# Altium PCB BalanceCar_pcb.PcbDoc (part 2 of 2)
Units mil, origin at the board's own origin, x right, y up, seen from the top; angles counter-clockwise.
Board outline 4685.52 x 2519.84 mil, 2 copper layers (Top Layer, Bottom Layer); 150 components, 131 nets, 624 pads, 420 vias.
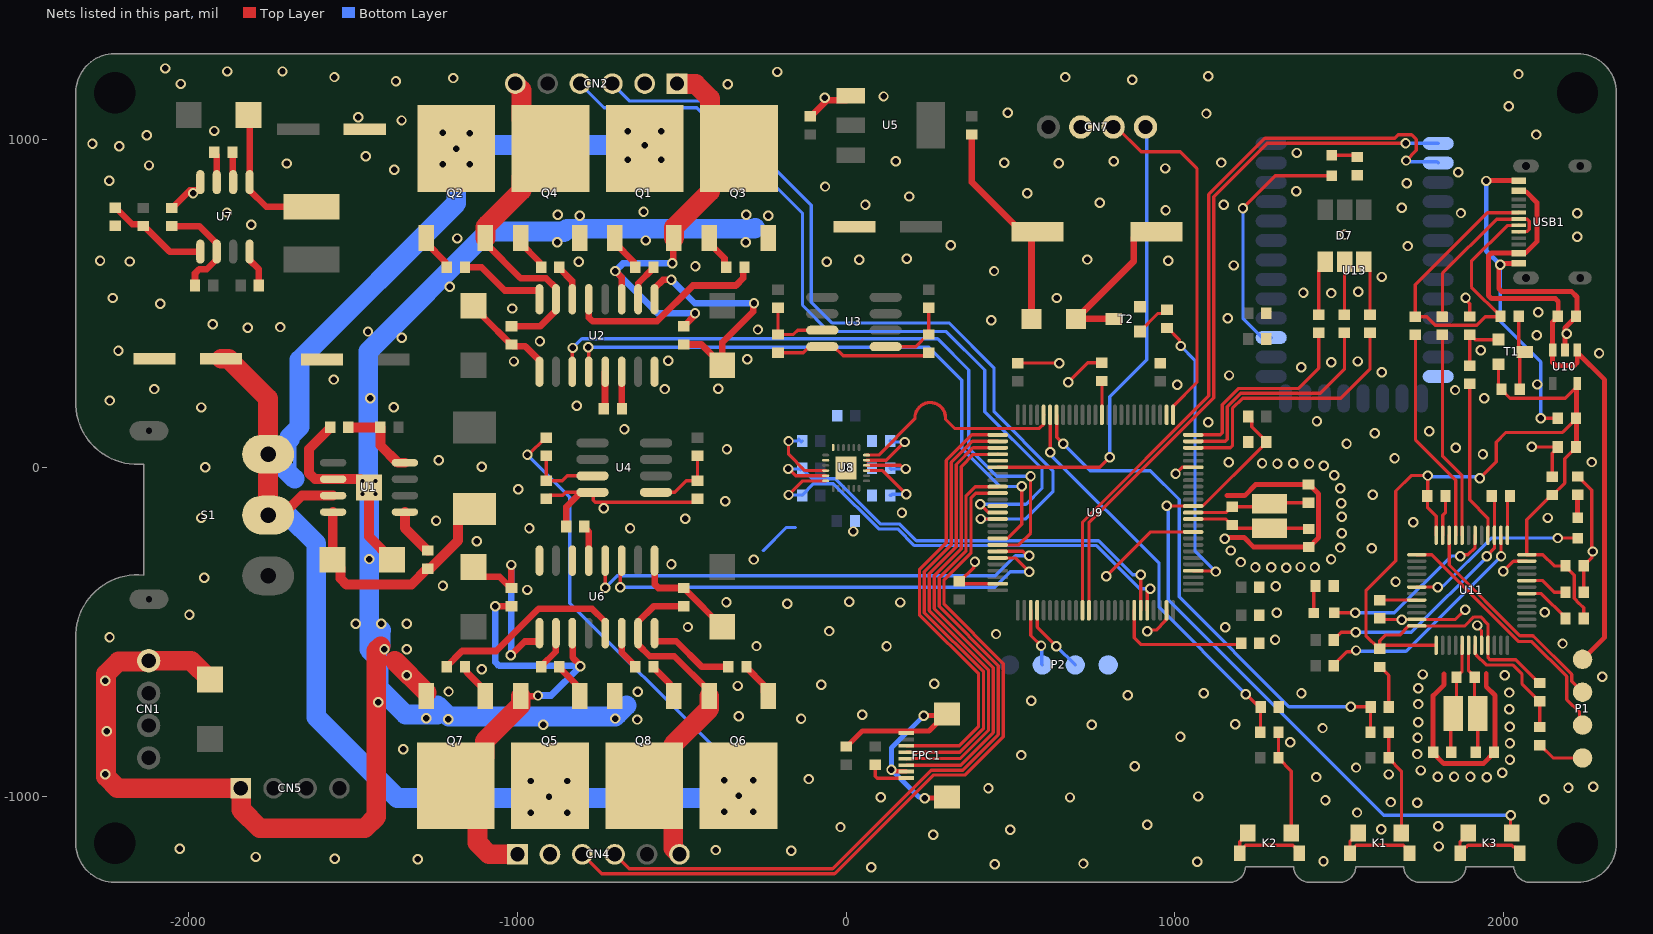
[diagram p2: the nets of this part, all layers, seen from the top]

## Via types
v1: diameter 31.5, hole 19.68, Top Layer to Bottom Layer, tented both sides, 415 vias
v2: diameter 24, hole 12, Top Layer to Bottom Layer, 4 vias
v3: diameter 31.5, hole 19.68, Top Layer to Bottom Layer, 1 vias

## Nets (pads, with @x,y where several pads share a name; then routed paths per layer and width w, separated by ;. In a path a pad name is that pad's centre, name@x,y a point inside that pad or via, vN(x,y) a via of type N, cw(c..) or ccw(c..) an arc to the next point about the centre after c; other vN are vias at no path point) (continued)
GND: C3.2 C4.2 C7.2 C8.1 C10.1 C11.1 C12.2 C13.1 C14.1 C15.1 C16.1 C17.1 C18.1 C19.1 C20.1 C21.1 C22.2 C23.2 C24.1 C25.2 C26.2 C27.1 C28.1 C29.1 C30.1 C31.1 C32.1 C33.1 C34.1 C35.1 C36.1 C37.1 C38.1 CN1.4 CN2.2 CN4.2 CN5.1 CN7.3 D2.2 D11.2 FPC1.2 FPC1.8 FPC1.9 FPC1.10 K1.1 K1.2 K1.4 K2.1 K2.2 K2.4 K3.1 K3.2 K3.4 P1.1 P2.1 Q3.3 Q4.3 Q7.3 Q8.3 R4.1 R6.1 R10.1 R11.1 R13.1 R14.1 R20.1 R23.1 R28.2 R30.1 R39.1 R40.1 R42.2 R43.1 R44.1 R53.2 R58.1 R60.1 T2.2 U1.6 U1.9 U2.6 U2.8 U3.4 U4.4 U5.1 U6.6 U6.8 U7.2 U7.4 U8.18 U8.20 U9.10 U9.20 U9.27 U9.74 U9.99 U10.2 U11.8 U11.23 U11.35 U11.47 U13.13 USB1.A1 USB1.A12 | length 14852.9
  Top Layer w10: R4.1@-912,-94 -901.25,-83.25 -861.55,-83.25 -852.23,-73.94 U4.4@-806.39,-73.94 ; U4.4@-788.67,-73.94 -780.56,-82.05 -769,-82.05 -769,-98.64 -763.14,-104.5 -462.5,-104.5 R11.1@-452,-94 ; R6.1@-207.03,350.89 -130.48,350.89 -112.37,369 U3.4@-72.46,369 -37.02,369 -9.02,341 241.11,341 R14.1@251,350.89 ; v1(392,-285) 387.89,-289.11 387.89,-303.08 345.97,-345 C27.1@344,-345 351.05,-352.05 U9.74@461.12,-352.05 ; C28.1@522,319 v1(648,319) ; v1(676,261) 734.61,319.61 R53.2@778,319.61 ; v1(791.45,-329.33) 926.21,-194.57 U9.10@1055.6,-194.57 ; v1(916,-497) 920.11,-492.89 943.16,-492.89 971.11,-464.93 971.11,-462.62 974.9,-458.83 U9.99@974.9,-432.75 ; v1(1002,-18) 1021.94,1.94 1055.25,1.94 U9.20@1055.6,2.29 ; K2.2@1197.4,-1171.5 K2.2@1197.4,-1165.6 ; K2.4@1222,-1110.5 1222,-1112.5 1203.4,-1131.1 1203.26,-1131.1 1197.4,-1136.96 K2.2@1197.4,-1165.6 ; K2.1@1378.5,-1171.5 1378.5,-1165.6 1365.8,-1152.9 1363.9,-1152.9 1358.7,-1147.7 1215.3,-1147.7 K2.2@1197.4,-1165.6 ; K1.2@1532.4,-1171.5 K1.2@1532.4,-1165.6 ; K1.4@1557,-1110.5 1557,-1112.5 1538.4,-1131.1 1538.26,-1131.1 1532.4,-1136.96 K1.2@1532.4,-1165.6 ; R42.2@1622.84,-457 1626.42,-460.58 U11.47@1735.68,-460.58 1853.42,-460.58 v1(1883,-431) ; C37.1@1623.06,-605.11 1625.03,-605.11 1650.81,-630.89 C22.2@1650.81,-727 ; K1.1@1713.5,-1171.5 1713.5,-1165.6 1694.9,-1147 1551,-1147 K1.2@1532.4,-1165.6 ; U11.35@1814.42,-204.68 1814.42,-143.35 1823.11,-134.66 C35.1@1823.11,-85 ; K3.2@1867.4,-1171.5 K3.2@1867.4,-1165.6 ; v1(1884,518) 1884,512.18 1896.48,499.7 R28.2@1896.48,460.84 ; K3.4@1892,-1110.5 1892,-1112.5 1873.4,-1131.1 1873.26,-1131.1 1867.4,-1136.96 K3.2@1867.4,-1165.6 ; v1(1920,-479) 1920,-482.26 1932.53,-494.79 U11.8@1932.53,-539.32 ; C24.1@1970.63,-866.6 C24.1@1970.63,-864.63 ; v1(1999,-314) 2029.58,-283.42 U11.23@2070.32,-283.42 ; K3.1@2048.5,-1171.5 2048.5,-1165.6 2035.8,-1152.9 2029.9,-1152.9 2024.7,-1147.7 1891.2,-1147.7 1886,-1152.9 1880.1,-1152.9 K3.2@1867.4,-1165.6 ; v1(2085.41,64.06) 2085.63,63.84 C16.1@2164.67,63.84 2164.67,61.87 2148,45.2 C38.1@2148,-26.89 ; C23.2@2109.79,-843 2111.76,-843 2150.76,-882 P1.1@2240,-882 ; v1(2113,151) 2113.16,150.84 C17.1@2164.67,150.84 ; R44.1@2224.81,-26.05 2226.78,-26.05 2268,-67.27 2268,-273.14 2256.02,-285.13 2254.05,-285.13 2243.3,-295.87 C36.1@2243.3,-297.84 R58.1@2243.3,-377.84
  Top Layer w15: C21.1@0,-847.19 1.97,-847.19 49.16,-800 252.03,-800 FPC1.10@299.03,-753 ; v1(138,-917.59) 142.46,-917.59 147.25,-922.37 FPC1.2@182.22,-922.37 ; v1(236,-753) FPC1.10@299.03,-753 ; v1(239,-1004) 303.92,-1004 FPC1.9@307.5,-1000.42 ; FPC1.10@307.51,-748.46 303.57,-748.46 FPC1.10@299.03,-753 ; 1158,-84 1212,-84 1245.63,-50.37 C20.1@1406.4,-50.37 1408.37,-50.37 1436.83,-78.83 1436.83,-212.29 1408.58,-240.53 C19.1@1406.62,-240.53 1239.53,-240.53 1210,-211 v1@1159,-211 ; 1819,-626 1819,-659 1785.41,-692.59 C34.1@1785.41,-864.84 1785.41,-866.81 1817.6,-899 1938.23,-899 C24.1@1970.63,-866.6 ; 1947,-625 1947,-665 1974,-692 1974,-861.26 C24.1@1970.63,-864.63 ; v1(1947,873) 1948,874 USB1.A12@2045.6,874 ; USB1.A1@2045.6,622 1993.79,622 v1(1989.39,617.61) 1985,613.21 1985,545.79 1993.79,537 2206,537 2223,520 2223,465.06 C18.1@2219.78,461.84 2219.78,459.87 2186.32,426.42 U10.2@2186.32,359.02
  Top Layer w20: C11.1@-2051,790.86 -2049.03,790.86 -1995.9,843.99 -1966.22,843.99 -1964,846.21 U7.4@-1964,869.22 ; C10.1@-1866,960 -1864.92,958.92 -1864.92,870.14 U7.2@-1864,869.22 ; U1.9@-1476,-34 U1.9@-1451,-59 ; R20.1@-851.11,-178 -851.11,-118.66 -806.39,-73.94 U4.4@-788.67,-73.94 ; U2.6@-682.52,292.61 -681.95,292.04 -681.95,180.63 R13.1@-681.39,180.06 ; C8.1@-109.16,1069.31 -107.19,1069.31 -57.51,1118.99 0.22,1118.99 U5.1@13.84,1132.61
  Top Layer w30: R10.1@-1569.27,123.52 -1569.27,121.55 -1633,57.82 -1633,-16 -1615,-34 U1.6@-1560.02,-34 U1.9@-1476,-34 ; U1.9@-1451,-59 -1451,-208.9 D2.2@-1380.9,-279
  Top Layer w60: D11.2@-1935,-643.45 -1992.08,-586.36 CN1.4@-2121,-586.37 -2123.08,-588.44 -2212.63,-588.44 -2251,-626.81 -2251,-801 -2251,-938.85 -2215.85,-974 CN5.1@-1841,-974 -1839.5,-975.5 -1839.5,-1039.5 -1783,-1096 -1464.15,-1096 -1429,-1060.85 -1429,-556 v1@-1415,-542 ; -1372.63,-586.36 Q7.3@-1276.28,-682.72
  Bottom Layer w10: -252.21,-251.21 -182,-181 -155,-181 ; v1(1989.39,617.61) 1989.39,446.11 2113,322.5 v1(2113,151)
  Bottom Layer w15: v1(236,-753) 138,-851 v1(138,-917.59) 221.25,-1000.84 235.84,-1000.84 v1(239,-1004) ; v1(1947,873) 1947,660 v1(1989.39,617.61)
  Bottom Layer w60: -1415.5,-539 -1415.5,-495.5 -1413.5,-493.5 ; -1242.98,-749.75 -1340.25,-749.75 -1422,-668 -1422,-580 -1450.5,-551.5 -1450.5,-70.5 -1453,-68 -1453,355 -1088.75,719.25 -859.25,719.25 -858,718 -848.72,727.28 -278.72,727.28 -276,730 ; -1242.98,-721.22 -1208.21,-756 v1@-701.76,-756 ; v1@-695.51,-749.75 -667.98,-722.22
  other v1: 77,-1214 452,-1205 722,-1203 1068,-1198 1452,-1196 -1303,-1190 -1555,-1188 -1795,-1183 -167,-1164 -396,-1162 -2027,-1158 1802,-1151 265,-1115 499,-1100 1628,-1099 -17,-1092 1801,-1090 916,-1085 1554,-1048 1737,-1018 1657,-1016 1458,-1011 2123,-1008 681,-1002 105,-1001 1071,-999 433,-974 2197,-973 2272,-970 -114,-946 1948,-941 1430,-940 1799,-939 1849,-939 1899,-939 1650,-932 -2253,-931 1996,-927 1748,-920 1551,-911 878,-907 2019,-887 533,-873 1737,-870 -1347,-855 2019,-837 1351,-834 1738,-820 1017,-817 -2248,-801 1449,-791 2018,-787 -921,-781 747,-781 1184,-779 1740,-773 -635,-765 -1210,-764 -702,-762 -136.89,-762.3 -1277,-761 -326,-755 49,-750 2017,-734 1740,-718 -1423,-713 563,-708 857,-691 1088,-685 1385,-685 2017,-683 -634,-681 -1209,-680 1740,-670 -330,-663 -76,-659 268,-656 -2253.32,-647.54 2300,-635 -1336,-630 2003,-630 1754,-628 -1108,-612 -1404,-551.75 -1336,-551.75 -272.46,-541.6 123,-542 2179,-534 1304.54,-522.6 -2240,-515 456,-505 -51,-496 -480.97,-483.65 1153,-484 -1491,-473.5 -1413.5,-473.5 -1336,-473.5 1690,-462 -1997,-446 1309.54,-440.6 2125,-439 -179,-413 165,-409 -363.75,-407.93 10,-407 -970,-371 1306.54,-359.6 -1226,-358 1671,-346 -1952,-334 1339,-303 1245,-302 1293,-302 1426,-302 1382,-301 -531.01,-293.24 1200,-286 -280.53,-278.47 1475,-278 -1450,-277 2271,-254 1170,-251 1599,-244 1503,-242 -1123,-223 1152,-215 1507,-198 22,-193 -963,-183 -657,-183 1725,-165 -1247,-161 -489,-154 -1961,-152 2134,-152 1507,-148 170,-136 -737,-122 1506,-107 -368,-101 1602,-81 -996.97,-65.22 1503,-62 1485,-22 0,0 -1949,2 -1108,4 1453,7 1312,13 1408,13 1265,14 1360,14 1163.54,17.4 2268,18 -1239,24 1668,30 1937,42 -362.21,57.51 1854,62 1522,74 1608,106 1774,112 -674,118 1101,139 1432,142 -1961,184 -1376,185 -819.44,189.04 -2239.85,205.16 -1447,212 1941,212 1852,237 -2104,240 -552,240 -389,241 1007,253 2102,254 -1558,269 1164.77,281.33 1629,291 1384,306 1476,322 -1010,324 1556,324 -541,326 -301,331 2290,349 -2213,357 1930,358 -931,385 -1351,396 2101,404 2192,408 -1454,415 -268,421 -1820,426 -1721.11,428.62 -1926,437 441.23,448.87 1161,455 2105,474 -1015,485 -2086,500 -2230,517 641,517 1476,532 1391,533 1558,536 -1205,551 1629,581 450,599 -458,614 1179,616 -813,627 -59,627 -2179,628 -2269,630 980,630 40,633 733,634 184,636 1708,675 318,677 -878,686 -305,686 -609,692 -1183,698 2224.11,702.91 1516,710 -1809,740 -810,767 -237,767 -877,770 -304,770 1870.06,775.42 2224,775 -1883,777 -616,779 971.54,783.4 1690,791 59,801 1149,801 771.54,806.4 191.8,825.69 550.54,835.4 -1986,836 1369,842 -64,856 1705,866 -2241,874 1862,899 -1374,907 971,911 -2120,920 -1701,926 646.54,926.4 481,928 1141,929 151,933 813.54,933.4 -1461,948 1371,958 -2210,978 -2292,986 -2127,1012 2099,1014 -1922,1025 -1352,1057 -1484,1067 1096,1078 492,1080 2015,1100 -65,1126 114,1130 -359.46,1167.4 -2024,1168 -1369,1176 870,1181 -1195,1186 -1556,1189 667,1189 1102,1191 2045,1198 -209.46,1204.4 -1882,1206 -1714,1206 -2071,1215
  other v2: -1470.68,-78.68 -1431.31,-78.68 -1470.68,-39.31 -1431.31,-39.31
ISP_RX: P2.2 U9.79 | length 214.7
  Top Layer w10: U9.79@581.19,-432.75 581.19,-483.94 v1(639.25,-542)
  Bottom Layer w10: v1(639.25,-542) 639.5,-542 696.5,-599 P2.2@697,-599
ISP_TX: P2.3 U9.78 | length 181
  Top Layer w10: U9.78@561.51,-432.75 561.51,-509.51 v1(593,-541)
  Bottom Layer w10: v1(593,-541) 595,-543 595,-597 P2.3@597,-599
LCD_DC: FPC1.4 U9.53 | length 1349.7
  Top Layer w10: FPC1.4@183.49,-884.28 184.4,-883.37 347.99,-883.37 433,-798.36 433,-613.64 253,-433.64 253,-321.43 335,-239.43 335,10.57 385.77,61.34 U9.53@461.12,61.34
LCD_RES: FPC1.3 U9.54 | length 1349.7
  Top Layer w10: FPC1.3@183.49,-903.97 348.61,-903.97 448,-804.57 448,-607.43 268,-427.43 268,-327.64 350,-245.64 350,4.36 386.95,41.31 460.77,41.31 U9.54@461.12,41.66
LCD_SCL: FPC1.6 U9.51 | length 1349.7
  Top Layer w10: FPC1.6@183.49,-844.91 344.03,-844.91 403,-785.93 403,-626.07 223,-446.07 223,-309 305,-227 305,23 382.71,100.71 U9.51@461.12,100.71
LCD_SDA: FPC1.5 U9.52 | length 1349.7
  Top Layer w10: FPC1.5@183.49,-864.6 345.55,-864.6 418,-792.15 418,-619.85 238,-439.85 238,-315.21 320,-233.21 320,16.79 384.24,81.03 U9.52@461.12,81.03
LED_CON: D10.1 U11.42 | length 552.5
  Top Layer w10: U11.42@1735.68,-362.16 1798.16,-362.16 v1(1799,-363) ; v1(2164,-213) 2224.16,-213 D10.1@2225.27,-214.11
  Bottom Layer w10: v1(1799,-363) 1803.11,-358.89 1816.11,-358.89 1962,-213 v1(2164,-213)
LED_RUN: D9.1 U11.30 | length 547.6
  Top Layer w10: D9.1@1484.97,-440.72 1485.23,-440.47 v1(1548.95,-440.47) ; v1(1868,-268) 1872.11,-263.89 1891.11,-263.89 1912.84,-242.16 U11.30@1912.84,-204.68
  Bottom Layer w10: v1(1548.95,-440.47) 1667.53,-440.47 1840,-268 v1(1868,-268)
MODE: C26.1 R56.2 U9.45 | length 1238.6
  Top Layer w10: U9.45@620.56,161.73 620.56,106.64 v1(620.56,48.26) v1@623,45.82 ; v1(1216,-688) 1217.7,-688 1258.7,-729 C26.1@1260.09,-727.61 ; R56.2@1260.09,-803.89 C26.1@1260.09,-727.61 ; C26.1@1260.7,-727 C26.1@1260.09,-727.61
  Bottom Layer w10: v1(620.56,48.26) 620.56,42.44 628.89,34.11 628.89,33.11 952,-290 952,-424 v1(1216,-688)
MOTO1_A: C5.2 CN2.1 Q1.3 Q3.2 U2.11 | length 1600.2
  Top Layer w20: v1(-702,599) -682.52,579.52 U2.11@-682.52,513.08 ; v1(-528.29,622.18) -526.09,624.38 -526.09,699.61 -524.7,701 Q1.3@-523.42,699.72 ; C5.2@-493.72,430.7 -459.52,464.91 v1(-459.52,470.52)
  Top Layer w60: Q1.3@-523.42,699.72 -523.42,731.58 -413.84,841.16 -413.84,883.85 -365.85,931.85 -413.84,979.84 -413.84,1123.84 -457.5,1167.5 -512.44,1167.5 CN2.1@-513.93,1169 ; Q3.2@-413.84,1060.07 Q3.2@-325.73,971.96 -325.73,985.74 Q3.2@-413.84,1073.85
  Bottom Layer w20: v1(-528.29,622.18) -678.82,622.18 v1(-702,599) -573.52,470.52 v1(-459.52,470.52)
MOTO1_B: C1.2 CN2.6 Q2.3 Q4.2 U2.15 | length 1105.7
  Top Layer w20: Q2.3@-1096.76,699.72 -1096.76,683.98 -990.06,577.28 -912.28,577.28 -882.52,547.53 U2.15@-882.52,513.08 -882.52,478.63 -930.45,430.7 C1.2@-1017.52,430.7
  Top Layer w60: Q2.3@-1096.76,699.72 -1096.76,733.24 -1090.38,739.62 -1090.38,740.62 -987.18,843.82 -987.18,883.85 Q4.2@-899.07,971.96 -987.18,1060.07 -987.18,1149.31 -1006.06,1168.19 CN2.6@-1006.06,1169
MOTO2_A: C9.2 CN4.1 Q5.3 Q7.2 U6.11 | length 1505
  Top Layer w20: v1(-1067,-421) -1066.51,-420.51 -1018.22,-420.51 C9.2@-1017.73,-420.02 ; Q5.3@-989.62,-694.04 -939.04,-694.04 v1(-937,-692) ; U6.11@-832.52,-502.39 -831.83,-503.09 -831.83,-576.06 -808,-599.89 v1(-808,-603)
  Top Layer w60: CN4.1@-999.13,-1175 -1086.03,-1175 -1121.18,-1139.85 -1121.18,-1032.41 Q7.2@-1187.31,-966.28 -1099.2,-878.17 -1099.2,-831.2 -989.62,-721.62 Q5.3@-989.62,-694.04
  Bottom Layer w20: v1(-1067,-421) -1067,-590.28 -1055.28,-602 -809,-602 v1(-808,-603) -897,-692 v1(-937,-692)
MOTO2_B: C6.2 CN4.6 Q6.3 Q8.2 U6.15 | length 1125.1
  Top Layer w20: C6.2@-493.93,-420.02 -584.59,-420.02 -632.52,-467.94 U6.15@-632.52,-502.39 -632.52,-536.84 -597.08,-572.28 -522.29,-572.28 -416.28,-678.29 Q6.3@-416.28,-694.04
  Top Layer w30: CN4.6@-510.86,-1171.14 CN4.6@-507,-1175
  Top Layer w60: CN4.6@-510.86,-1171.14 -525.86,-1156.14 -525.86,-1054.39 Q8.2@-613.97,-966.28 -525.86,-878.17 -525.86,-841.86 -416.28,-732.28 Q6.3@-416.28,-694.04
MPU_INT: U8.12 U9.46 | length 691.1
  Top Layer w10: U8.12@62.01,39.37 99.37,39.37 209.41,149.41 209.41,157.79 209.74,158.12 cw(c255.91,152.56) 301.92,159.26 302.4,158.77 302.4,147.6 329.77,120.23 587.77,120.23 600.53,132.99 600.53,161.38 U9.46@600.88,161.73
MPU_SCL: R36.1 U8.23 U9.95 | length 1441.2
  Top Layer w10: v1(-176,-3) -173.76,-3 -153.14,-23.62 U8.23@-62.01,-23.62 ; v1(896,-325) 896,-376.41 896.16,-376.57 U9.95@896.16,-432.75
  Bottom Layer w10: v1(-176,-3) -141.44,-3 -138.44,-6 R36.1@-133.24,-0.8 -133.24,-2.77 -103.01,-33 -32.39,-33 105.11,-170.5 163.5,-170.5 214,-221 768,-221 872,-325 v1(896,-325)
MPU_SDA: R35.1 U8.24 U9.96 | length 1447.6
  Top Layer w10: v1(-175,-82) -132.37,-39.37 U8.24@-62.01,-39.37 ; U9.96@915.84,-432.75 915.84,-376.16 v1(925,-367)
  Bottom Layer w10: v1(-175,-82) -134.9,-82 -133.9,-83 -133.9,-82.35 -99.55,-48 -38.61,-48 98.89,-185.5 157.29,-185.5 207.79,-236 761.79,-236 892.79,-367 v1(925,-367)
NetB1_1: B1.1 D8.2 R38.2 | length 645.6
  Top Layer w20: R38.2@382,1014.2 382,869.68 532.68,719 548,719 564,703 D8.2@564,453
NetB1_2: B1.2 D8.1 T2.3 | length 510.9
  Top Layer w20: D8.1@699,453 D8.1@699.5,453.5 ; T2.3@814,453.5 D8.1@699.5,453.5 ; B1.2@944.1,719 894.89,719 875.36,699.47 875.36,629.36 D8.1@699.5,453.5
NetC1_1: C1.1 D1.1 U2.1 | length 306.3
  Top Layer w20: D1.1@-1133,493.39 -1103.63,464.02 -1103.63,459.74 -1019.49,375.59 C1.1@-1017.52,375.59 -1011.77,369.84 -975.31,369.84 -932.52,327.06 U2.1@-932.52,292.61
NetC2_1: C2.1 D2.1 L1.2 U1.8 | length 759.6
  Top Layer w30: U1.8@-1560.02,-134 -1561.01,-134.99 -1561.01,-278.01 D2.1@-1562,-279 -1537.63,-303.37 -1537.63,-336.43 -1520.06,-354 -1321.72,-354 -1273.97,-306.25 C2.1@-1272,-306.25 -1271.25,-305.5 -1264.61,-305.5 -1180.35,-221.24 -1180.35,-158.84 -1146.65,-125.13 L1.2@-1130,-125.13
NetC2_2: C2.2 U1.1 | length 147.3
  Top Layer w30: U1.1@-1341.98,-134 -1341.98,-183.12 -1273.97,-251.14 C2.2@-1272,-251.14
NetC5_1: C5.1 D3.1 U2.9 | length 748.1
  Top Layer w20: U2.9@-582.52,513.08 -582.52,546.55 -557.07,572 v1(-531,572) ; C5.1@-493.72,375.59 -439.8,375.59 D3.1@-376.5,312.29 -376.5,381.66 -282.2,475.96 -282.2,498.8 v1(-280,501)
  Bottom Layer w20: v1(-531,572) -460.27,501.27 -280.27,501.27 v1(-280,501)
NetC6_1: C6.1 D4.1 U6.1 | length 332.3
  Top Layer w20: U6.1@-582.52,-281.92 -582.52,-353.19 -570.8,-364.91 -491.97,-364.91 -486.22,-370.66 -486.22,-372.99 D4.1@-376.5,-482.71
NetC9_1: C9.1 D5.1 U6.9 | length 616.1
  Top Layer w20: D5.1@-1133,-301.61 -1103.63,-330.98 -1053.63,-330.98 -1019.7,-364.91 C9.1@-1017.73,-364.91 -1017.73,-295.87 v1(-1018.71,-294.89) ; v1(-1019.55,-569.88) -977.44,-527.76 -934.19,-527.76 -932.52,-526.09 U6.9@-932.52,-502.39
  Bottom Layer w20: v1(-1019.55,-569.88) -1018.71,-569.03 v1(-1018.71,-294.89)
NetC10_2: C10.2 U7.3 | length 93.7
  Top Layer w20: C10.2@-1921.11,960 -1921.11,958.03 -1914,950.92 U7.3@-1914,869.22
NetC11_2: C11.2 R22.1 U7.6 | length 327.3
  Top Layer w20: C11.2@-2051,735.75 -1967.44,735.75 -1914,682.31 U7.6@-1914,658 -1914,634.99 -1944.5,604.49 -1967.51,604.49 -1980.11,591.89 R22.1@-1980.11,555
NetC15_2: C15.2 U8.10 | length 170.6
  Top Layer w10: U8.10@62.01,7.87 164.56,7.87 175.43,-3 v1@179,-3
  Bottom Layer w10: C15.2@133.85,-0.8 137.05,-4 138.05,-3 v1(181.25,-3)
NetC23_1: C23.1 R49.1 U11.7 | length 378.7
  Top Layer w10: U11.7@1912.84,-539.32 1912.84,-563.7 1917.22,-568.08 1917.22,-569.87 1946.28,-598.94 2026.94,-598.94 2056,-628 2056,-657.08 2108.03,-709.11 R49.1@2110,-709.11 2109.79,-709.32 C23.1@2109.79,-787.89
NetD6_2: D6.2 L2.2 U7.1 | length 438.6
  Top Layer w20: D6.2@-1817.9,1073 -1814,1069.1 -1814,844.91 -1763.59,794.5 L2.2@-1626,794.5
NetD7_4: D7.4 R32.2 | length 169
  Top Layer w10: R32.2@1437.84,466.34 1437.84,600.47 1456.95,619.58 D7.4@1456.95,627.45
NetD7_5: D7.5 R29.2 | length 161.3
  Top Layer w10: R29.2@1515.59,466.34 1515.59,627.04 D7.5@1516,627.45
NetD7_6: D7.6 R27.2 | length 169.1
  Top Layer w10: D7.6@1574.06,627.45 1574.06,619.58 1593.34,600.3 R27.2@1593.34,466.34
NetD9_2: D9.2 R43.2 | length 84.3
  Top Layer w10: D9.2@1422.02,-441 1422.02,-364.57 R43.2@1427.59,-359
NetD10_2: D10.2 R44.2 | length 70.1
  Top Layer w15: R44.2@2224.81,-81.16 2224.9,-81.25 2224.9,-151.07 D10.2@2224.99,-151.16
NetD12_1: D12.1 U13.24 | length 756.4
  Top Layer w10: v3(1207,790) 1305.48,888.48 D12.1@1477.28,888.48
  Bottom Layer w10: v3(1207,790) 1207,454.89 1265.44,396.45 U13.24@1293,396.45
NetD12_2: D12.2 R60.2 | length 80.3
  Top Layer w10: D12.2@1477,951.43 1549.43,951.43 R60.2@1555,945.86
NetFPC1_1: FPC1.1 R46.2 | length 132.1
  Top Layer w10: R46.2@89,-902.3 89,-937.48 94.86,-943.34 FPC1.1@183.49,-943.34
NetK1_3: K1.3 R48.1 R51.1 | length 322.6
  Top Layer w10: R51.1@1650.2,-803.89 R48.1@1650.2,-881 1650.2,-882.97 1688.9,-921.67 K1.3@1688.9,-1110.5
NetK2_3: K2.3 R54.1 R56.1 | length 322.6
  Top Layer w10: R56.1@1315.2,-803.89 R54.1@1315.2,-881 1315.2,-882.97 1353.9,-921.67 K2.3@1353.9,-1110.5
NetQ1_1: Q1.1 R2.2 | length 115.5
  Top Layer w20: Q1.1@-702.95,699.72 -702.95,683.98 -646.49,627.52 -646.49,615.75 R2.2@-640.74,610
NetQ2_1: Q2.1 R1.1 | length 115.5
  Top Layer w20: Q2.1@-1276.28,699.72 -1276.28,683.98 -1219.82,627.52 -1219.82,615.75 R1.1@-1214.07,610
NetQ3_1: Q3.1 R9.2 | length 111.3
  Top Layer w20: Q3.1@-416.28,699.72 -416.28,683.98 -369.86,637.55 -369.86,615.75 R9.2@-364.11,610
NetQ4_1: Q4.1 R8.1 | length 115.5
  Top Layer w20: Q4.1@-989.62,699.72 -989.62,683.98 -933.16,627.52 -933.16,615.75 R8.1@-927.41,610
NetQ5_1: Q5.1 R16.2 | length 114.8
  Top Layer w20: R16.2@-872.3,-605 -872.3,-606.97 -823.71,-655.55 -823.71,-680.42 Q5.1@-810.09,-694.04
NetQ6_1: Q6.1 R17.1 | length 116.5
  Top Layer w20: R17.1@-303,-605 -303,-606.97 -250.38,-659.59 -250.38,-680.42 Q6.1@-236.76,-694.04
NetQ7_1: Q7.1 R19.2 | length 114.8
  Top Layer w20: R19.2@-1158.96,-605 -1153.22,-610.75 -1153.22,-621.83 -1096.76,-678.29 Q7.1@-1096.76,-694.04
NetQ8_1: Q8.1 R18.1 | length 114.8
  Top Layer w20: R18.1@-585.63,-605 -585.63,-606.97 -537.05,-655.55 -537.05,-680.42 Q8.1@-523.42,-694.04
NetR1_2: R1.2 U2.16 | length 281.3
  Top Layer w20: R1.2@-1158.96,610 -1108,610 -1037.87,539.87 -934.19,539.87 -932.52,538.19 U2.16@-932.52,513.08
NetR2_1: R2.1 U2.10 | length 116.3
  Top Layer w20: U2.10@-632.52,513.08 -631.83,513.77 -631.83,561.84 -585.63,608.03 R2.1@-585.63,610
NetR3_1: R3.1 R10.2 U1.4 | length 248.7
  Top Layer w30: R10.2@-1514.16,123.52 R3.1@-1416.27,123.52 -1415.52,122.77 -1415.52,68.12 -1363.4,16 U1.4@-1341.98,16
NetR4_2: R4.2 R5.1 U4.3 | length 223.1
  Top Layer w10: R5.1@-912,37 R4.2@-912,-38.89 -862.69,-38.89 -847.74,-23.94 U4.3@-770.96,-23.94
NetR6_2: R6.2 R7.1 U3.3 | length 220.8
  Top Layer w10: R7.1@-207.03,486.89 R6.2@-207.03,406 -159.98,406 -146.98,419 U3.3@-72.46,419
NetR8_2: R8.2 U2.14 | length 113.4
  Top Layer w20: R8.2@-872.3,610 -872.3,608.03 -833.21,568.95 -833.21,513.77 U2.14@-832.52,513.08
NetR9_1: R9.1 U2.13 | length 618.7
  Top Layer w20: U2.13@-782.52,513.08 -782.52,457.72 -770.8,446 -575,446 -466,555 -335,555 -312.45,577.55 -312.45,606.55 R9.1@-309,610
NetR11_2: R11.2 R12.1 U4.5 | length 216.5
  Top Layer w10: U4.5@-578.04,-73.94 -520.94,-73.94 -485.89,-38.89 R11.2@-452,-38.89 R12.1@-452,37
NetR13_2: R13.2 U2.5 | length 114.2
  Top Layer w20: R13.2@-736.5,180.06 -733.21,183.35 -733.21,291.91 U2.5@-732.52,292.61
NetR14_2: R14.2 R15.1 U3.5 | length 226.8
  Top Layer w10: U3.5@120.46,369 212.03,369 249.03,406 R14.2@251,406 R15.1@251,486.89
NetR16_1: R16.1 U6.10 | length 121.2
  Top Layer w20: R16.1@-927.41,-605 -927.41,-603.03 -883.21,-558.84 -883.21,-503.09 U6.10@-882.52,-502.39
NetR17_2: R17.2 U6.16 | length 280.3
  Top Layer w20: U6.16@-582.52,-502.39 -582.52,-525.17 -580.85,-526.84 -516.78,-526.84 -438.62,-605 R17.2@-358.11,-605
NetR18_2: R18.2 U6.14 | length 119.9
  Top Layer w20: U6.14@-682.52,-502.39 -681.83,-503.09 -681.83,-561.95 -640.74,-603.03 R18.2@-640.74,-605
NetR19_1: R19.1 U6.13 | length 607
  Top Layer w20: R19.1@-1214.07,-605 -1214.07,-603.03 -1167.68,-556.64 -1063.64,-556.64 -935,-428 -772.46,-428 -732.52,-467.94 U6.13@-732.52,-502.39
NetR20_2: R20.2 U6.5 | length 109.5
  Top Layer w20: R20.2@-796,-178 -796,-179.97 -782.52,-193.45 U6.5@-782.52,-281.92
NetR21_2: R21.2 U7.8 | length 114.6
  Top Layer w20: U7.8@-1814,658 -1814,632.39 -1785.89,604.28 R21.2@-1785.89,555
NetR23_2: R23.2 R24.2 U7.5 | length 314.3
  Top Layer w20: R23.2@-2223,791.47 -2221.03,791.47 -2171.06,741.5 -2142.75,741.5 R24.2@-2137,735.75 -2135.03,735.75 -2057.28,658 U7.5@-1964,658
NetR25_1: R25.1 R28.1 T1.1 | length 189
  Top Layer w10: R25.1@1896.48,310.95 R28.1@1896.48,405.73 1898.45,405.73 1913.83,390.35 T1.1@1984.33,390.35
NetR26_2: R26.2 R31.1 T1.3 | length 238.5
  Top Layer w10: R31.1@2045.59,461.84 2045.59,365.35 2058.59,352.35 T1.3@2061.59,352.35 ; R26.2@2048.59,239.84 2048.59,339.35 T1.3@2061.59,352.35 ; T1.3@2064.33,352.35 T1.3@2061.59,352.35
NetR30_2: R30.2 U9.94 | length 418.9
  Top Layer w10: U9.94@876.47,-432.75 876.81,-433.1 876.81,-516.81 897,-537 1197.45,-537 R30.2@1201.45,-533
NetR31_2: R31.2 R33.1 USB1.A6 USB1.B6 | length 1176.8
  Top Layer w10: USB1.A6@2045.6,738.2 2044.7,737.3 2010.3,737.3 1902,629 1902,550.32 R31.2@1990.48,461.84 1988.87,460.23 1943.48,460.23 1917.73,434.48 1791.78,434.48 1766.03,460.23 R33.1@1731,460.23 1731,557 1950.6,776.6 2044.7,776.6 USB1.B6@2045.6,777.5
NetR34_1: R34.1 U8.22 | length 222.1
  Top Layer w10: v1(-175,82) -175,42 -125.13,-7.87 U8.22@-62.01,-7.87
  Bottom Layer w10: v1(-175,82) -149.3,82 -144.3,87 -136.3,79 R34.1@-133.24,82.06
NetR37_1: R37.1 USB1.A7 USB1.B7 | length 528.5
  Top Layer w10: R37.1@1813.63,460.23 1813.63,591.63 1978.9,756.9 2044.7,756.9 USB1.A7@2045.6,757.8 2046.5,756.9 2072.19,756.9 2078.05,751.04 2078.05,725.26 2072.19,719.4 2046.5,719.4 USB1.B7@2045.6,718.5
NetR39_2: R39.2 U8.11 | length 184.7
  Top Layer w10: U8.11@62.01,23.62 122.87,23.62 176,76.75 v1@176,79
  Bottom Layer w10: R39.2@133.85,82.06 134.79,83 138.79,79 v1(178.25,79)
NetR40_2: R40.2 U8.9 | length 202.4
  Top Layer w10: U8.9@62.01,-7.87 111.09,-7.87 v1(183,-79.79)
  Bottom Layer w10: R40.2@133.85,-83.66 134.51,-83 135.51,-84 139.73,-79.79 v1(183,-79.79)
NetR41_2: R41.2 T2.1 | length 109.1
  Top Layer w10: T2.1@894,415.5 948.61,470.11 965.25,470.11 R41.2@976,480.86
NetR42_1: R42.1 U11.44 | length 113
  Top Layer w10: R42.1@1622.84,-401.89 1623.21,-401.53 U11.44@1735.68,-401.53
NetR52_1: R52.1 U11.25 | length 122.9
  Top Layer w10: U11.25@2011.27,-204.68 2011.27,-92.84 R52.1@2019.11,-85
NetR53_1: R53.1 U9.37 | length 102.8
  Top Layer w10: R53.1@778,264.5 778.04,264.46 U9.37@778.04,161.73
NetR58_2: R58.2 U11.20 | length 132.5
  Top Layer w10: U11.20@2070.32,-342.47 2118.39,-342.47 2153.76,-377.84 R58.2@2188.19,-377.84
NetR59_2: R59.2 U11.18 | length 150.5
  Top Layer w10: U11.18@2070.32,-381.84 2114.16,-381.84 2188.19,-455.87 R59.2@2188.19,-457.84
NRST: C25.1 K3.3 R55.1 U9.14 | length 2141.3
  Top Layer w10: v1(975,-115) 975.47,-115.47 1055.25,-115.47 U9.14@1055.6,-115.82 1055.94,-115.47 1085.53,-115.47 1266.98,65.98 1266.98,68.25 C25.1@1277.73,79 1277.73,80.97 1233.97,124.72 1233.97,145.79 R55.1@1223.23,156.53 ; v1(2021,-1056) 2021,-1107.6 K3.3@2023.9,-1110.5
  Bottom Layer w10: v1(975,-115) 979.11,-119.11 979.11,-130.72 980,-131.61 980,-401 1635,-1056 v1(2021,-1056)
OK: C22.1 R51.2 U9.44 | length 1614
  Top Layer w10: U9.44@640.25,161.73 640.59,161.38 640.59,93.41 v1(660,74) ; v1(1535,-726) 1594.7,-726 C22.1@1595.7,-727 1595.09,-727.61 R51.2@1595.09,-803.89
  Bottom Layer w10: v1(660,74) 742.49,-8.49 925.63,-8.49 1013,-95.86 1013,-392 1347,-726 v1(1535,-726)
OSC_IN: C19.2 R45.2 U9.12 Y1.2 | length 362.6
  Top Layer w10: U9.12@1055.6,-155.19 1154.38,-155.19 1172.5,-173.31 R45.2@1174.47,-173.31 1184.35,-183.19 Y1.2@1288.32,-183.19 1403.46,-183.19 C19.2@1405.69,-185.42
OSC_OUT: C20.2 R45.1 U9.13 Y1.1 | length 363.2
  Top Layer w10: U9.13@1055.6,-135.51 1155.2,-135.51 1172.5,-118.2 R45.1@1174.47,-118.2 1278.49,-118.2 Y1.1@1288.32,-108.38 1291.21,-105.48 C20.2@1406.4,-105.48
OSCIN: C34.2 R57.1 U11.5 Y2.2 | length 340
  Top Layer w10: C34.2@1838.52,-864.84 1839.11,-864.25 1839.11,-746.84 1856.41,-729.55 R57.1@1856.41,-636.86 1856.41,-634.89 1873.47,-617.83 U11.5@1873.47,-539.32
OSCOUT: C24.2 R57.2 U11.6 Y2.1 | length 335.3
  Top Layer w10: U11.6@1893.16,-539.32 1893.16,-616.53 1911.52,-634.89 R57.2@1911.52,-636.86 1911.52,-744.44 Y2.1@1913.93,-746.84 ; C24.2@1914.52,-862.84 1913.93,-862.25 1921.07,-855.11 Y2.1@1921.07,-746.84
POWER_OFF: U9.62
ST3.3V: C16.2 C17.2 C35.2 C36.2 C37.2 C38.2 R26.1 R49.2 R59.1 T1.2 U10.5 U11.1 U11.9 U11.24 U11.36 U11.48 | length 3505.1
  Top Layer w10: U11.1@1794.73,-539.32 1633.74,-539.32 C37.2@1623.06,-550 ; U11.36@1794.73,-204.68 1794.73,-146.1 1768,-119.37 C35.2@1768,-85 1769,-84 v1(1769,-23) 1719,-23 1672,-70 1672,-282 1581,-373 1581,-509.91 1621.09,-550 C37.2@1623.06,-550 ; v1(1927,-31) 1977,19 1977,78 2007.06,108.06 2178.97,108.06 2219.78,148.87 C17.2@2219.78,150.84 ; T1.2@1984.33,315.35 1984.33,248.99 R26.1@1993.48,239.84 1993.48,237.87 2019.23,212.13 2187.06,212.13 2221.75,246.82 U10.5@2221.75,254.69 ; R49.2@2110,-654 2108.03,-654 2037.03,-583 1958.19,-583 1952.33,-577.14 1952.33,-539.44 U11.9@1952.21,-539.32 1952.09,-539.2 1952.09,-474.67 1930.41,-453 1909.59,-453 1882.32,-480.27 U11.48@1735.68,-480.27 1711.47,-480.27 1683.74,-508 1640,-508 1623.06,-524.94 C37.2@1623.06,-550 ; C16.2@2219.78,63.84 2219.78,61.87 2186,28.09 2186,-45.97 2149.97,-82 C38.2@2148,-82 2146.03,-82 2070.32,-157.71 U11.24@2070.32,-263.73 2119.02,-263.73 2153.13,-297.84 C36.2@2188.19,-297.84 2188.19,-299.81 2214.6,-326.22 2214.6,-396.75 2230.26,-412.41 2230.59,-412.41 2243.3,-425.13 R59.1@2243.3,-457.84
  Top Layer w15: C16.2@2219.78,63.84 2221.75,65.81 U10.5@2221.75,246.82
  Bottom Layer w10: v1(1769,-23) 1773,-27 1923,-27 v1(1927,-31)
ST5V: C18.2 P1.4 U10.1 U10.3 USB1.A4 USB1.A9 | length 1993.3
  Top Layer w15: USB1.A4@2036,654 1962.79,654 1954,645.21 1954,523.79 1962.79,515 2157.21,515 2166,506.21 2166,463.17 C18.2@2164.67,461.84 2164.67,459.87 2148.92,444.13 U10.3@2148.92,359.03 2148.92,320.79 2157.71,312 2214.94,312 2223.72,320.79 U10.1@2223.72,351.15 ; USB1.A4@2045.6,653.5 2047.95,655.85 2068.28,655.85 2101,688.57 2101,807.53 2068.38,840.15 2047.95,840.15 USB1.A9@2045.6,842.5 ; U10.1@2223.72,359.02 U10.1@2223.72,351.15 ; P1.4@2240,-582 2307,-515 2307,267.87 U10.1@2223.72,351.15
ST_SWCLK: P1.2 U11.37 | length 777.6
  Top Layer w10: U11.37@1735.68,-263.73 1781.55,-263.73 2045.83,-528 2086,-528 2192.04,-634.04 2192.04,-704.33 2230.61,-742.9 2230.61,-772.61 P1.2@2240,-782
ST_SWDIO: P1.3 U11.34 | length 669
  Top Layer w10: U11.34@1834.1,-204.68 1834.1,-295.06 2049.45,-510.41 2089.41,-510.41 2092,-513 2092.21,-513 2207.04,-627.82 2207.04,-649.04 P1.3@2240,-682
TCK_SWCLK: R47.2 U11.26 | length 712.9
  Top Layer w10: R47.2@1483.31,-601 1483.31,-599.03 1523.23,-559.11 1546.89,-559.11 v1(1551,-555) ; U11.26@1991.58,-204.68 1991.7,-204.8 1991.7,-267.7 v1(1992,-268)
  Bottom Layer w10: v1(1551,-555) 1553,-557 1703,-557 v1(1992,-268)
TIM0_CH0: U2.4 U9.67 | length 1896.1
  Top Layer w10: v1(-784,367) -782.34,365.34 -782.34,292.78 U2.4@-782.52,292.61 ; U9.67@461.12,-214.25 491.57,-214.25 534,-171.82 v1(534,-56)
  Bottom Layer w10: v1(-784,367) 252,367 352,267 352,59.66 467.66,-56 v1(534,-56)
TIM0_CH1: U2.3 U9.68 | length 2076.9
  Top Layer w10: U2.3@-832.52,292.61 -832.76,292.85 -832.76,363.24 v1(-831,365) ; U9.68@461.12,-233.94 525.06,-233.94 561,-198 v1(561,-25)
  Bottom Layer w10: v1(-831,365) -803.25,392.75 278.25,392.75 373,298 373,60 458,-25 v1(561,-25)
TIM0_CH2: U6.4 U9.69 | length 1513.9
  Top Layer w10: v1(-732.76,-364.24) -732.76,-282.16 U6.4@-732.52,-281.92 ; U9.69@461.12,-253.62 537.8,-253.62 551.18,-267 v1(557,-267)
  Bottom Layer w10: v1(-732.76,-364.24) -696.52,-328 454,-328 515,-267 v1(557,-267)
TIM0_CH3: U6.3 U9.70 | length 1460
  Top Layer w10: v1(-687,-363) -687,-286.4 U6.3@-682.52,-281.92 ; U9.70@461.12,-273.31 461.46,-273.66 514.66,-273.66 v1(557,-316)
  Bottom Layer w10: v1(-687,-363) 452,-363 499,-316 v1(557,-316)
TIM1_CH0: R27.1 U9.23 | length 814.3
  Top Layer w10: U9.23@1055.6,61.34 1169.14,61.34 1175,67.2 1175,181 1206,212 1505,212 1593.34,300.34 R27.1@1593.34,411.23
TIM1_CH1: R29.1 U9.24 | length 719.8
  Top Layer w10: U9.24@1055.6,81.03 1153.14,81.03 1159,86.89 1159,186.21 1199.79,227 1442,227 1515.59,300.59 R29.1@1515.59,411.23
TIM1_CH2: R32.1 U9.25 | length 624.1
  Top Layer w10: U9.25@1055.6,100.71 1138.14,100.71 1144,106.57 1144,192.43 1193.57,242 1376,242 1437.84,303.84 R32.1@1437.84,411.23
TIM2_CH0: CN2.4 U9.63 | length 2473.2
  Top Layer w10: v1(408,-110.56) 408,-110.79 432.38,-135.16 460.77,-135.16 U9.63@461.12,-135.51
  Bottom Layer w10: CN2.4@-809.21,1169 -736.21,1096 -454,1096 -132.5,774.5 -132.5,495.5 -52,415 305,415 422,298 422,171 595.86,-2.86 595.86,-62.14 547.44,-110.56 v1(408,-110.56) ; CN2.4@-809.21,1189 CN2.4@-799.21,1179
TIM2_CH1: CN2.3 U9.64 | length 2461.8
  Top Layer w10: v1(409.75,-155) 409.84,-155.1 461.02,-155.1 U9.64@461.12,-155.19
  Bottom Layer w10: CN2.3@-710.78,1169 -657.78,1116 -423,1116 -106,799 -106,504 -43,441 313,441 450,304 450,171 629,-8 629,-73 547,-155 v1(409.75,-155) ; CN2.3@-710.78,1189 CN2.3@-700.78,1179
TIM3_CH0: CN4.4 U9.59 | length 2296.9
  Top Layer w10: CN4.4@-703.85,-1175 -659.85,-1219 -41.21,-1219 258.82,-918.97 354.82,-918.97 463,-810.79 463,-601.21 283,-421.21 283,-333.85 365,-251.85 365,-84 392.23,-56.77 U9.59@461.12,-56.77
TIM3_CH1: CN4.3 U9.60 | length 2399.6
  Top Layer w10: CN4.3@-802.28,-1175 -743.28,-1234 -35,-1234 265.03,-933.97 361.03,-933.97 478,-817 478,-595 298,-415 298,-340.07 380,-258.07 380,-90.21 393.76,-76.45 U9.60@461.12,-76.45
TIM4_CH3: CN7.2 U9.26 | length 1086.2
  Top Layer w10: CN7.2@812.22,1037 822,1037 897,962 1016,962 1067,911 1067,260 994.58,187.58 U9.26@994.58,161.73
TIM8_CH0: R41.1 U9.4 | length 872.6
  Top Layer w10: R41.1@976,425.75 977.97,425.75 1013.89,389.83 1013.89,375.11 v1(1018,371) ; U9.4@1055.6,-312.68 1055.94,-313.03 1122.03,-313.03 v1(1124,-315)
  Bottom Layer w10: v1(1018,371) 1061,328 1061,-252 v1(1124,-315)
TMS_SWDIO: R50.2 R52.2 U11.27 | length 769.4
  Top Layer w10: R50.2@1483.31,-523 1483.31,-521.03 1494.06,-510.28 1496.03,-510.28 1506.31,-500 v1(1550,-500) ; v1(1948,-268) 1971.9,-244.1 U11.27@1971.9,-204.68 1971.9,-92.9 R52.2@1964,-85
  Bottom Layer w10: v1(1550,-500) 1719,-500 1948,-271 v1(1948,-268)
USART1_RX: U9.87 U13.1 | length 2165.3
  Top Layer w10: U9.87@738.67,-432.75 738.67,-166.33 1118,213 1118,825 1280.5,987.5 v1(1701.5,987.5)
  Bottom Layer w10: v1(1701.5,987.5) 1800.37,987.5 U13.1@1800.87,987
USART1_TX: U9.86 U13.2 | length 2313.5
  Top Layer w10: U9.86@718.99,-432.75 718.99,-164.8 1103,219.21 1103,832 1274,1003 1669,1003 1679.25,1013.25 1719.89,1013.25 1734,999.14 1734,966 v1(1703,935)
  Bottom Layer w10: v1(1703,935) 1706.53,931.47 1797.35,931.47 U13.2@1800.87,927.94
USART2_RX: CN7.1 U9.56 | length 1405.5
  Top Layer w10: U9.56@461.12,2.29 461.26,2.14 771.14,2.14 v1(802,33)
  Bottom Layer w10: v1(802,33) 802,217 914,329 914,1033.63 CN7.1@910.63,1037
USART2_TX: U9.55
USB_ENUM: R25.2 U11.28 | length 483.6
  Top Layer w10: R25.2@1896.48,255.84 1896.48,-96.48 1952.21,-152.21 U11.28@1952.21,-204.68
USB_N: R37.2 U11.32 | length 634.6
  Top Layer w10: R37.2@1813.63,405.12 1814,404.76 1814,36 1873.47,-23.47 U11.32@1873.47,-204.68
USB_P: R33.2 U11.33 | length 660.7
  Top Layer w10: R33.2@1731,405.12 1732,404.12 1732,85 1853.79,-36.79 U11.33@1853.79,-204.68
VCC: C4.1 Q1.2 Q2.2 Q5.2 Q6.2 R5.2 S1.2 S1.3 U1.7 | length 6483
  Top Layer w10: v1(-969,40) -966.08,40 -913.97,92.11 R5.2@-912,92.11 R5.2@-913,93.11
  Top Layer w30: S1.2@-1757.8,-143.09 -1714.27,-143.09 -1655.17,-84 U1.7@-1560.02,-84
  Top Layer w60: C4.1@-1900.64,332 -1878.55,332 -1757.8,211.24 S1.3@-1757.8,41.94 S1.2@-1757.8,-143.09 ; Q6.2@-327.31,-966.28 -324,-969.58 Q6.2@-324,-1003
  Bottom Layer w10: -1753,-27 -1718,8 S1.3@-1688,38 ; -1677,-33 -1677,38 ; -1677,76.5 -1677,49 ; v1(-969,40) -840,-89 -840,-411 -395,-856 -395,-926 -372,-949 v1@-365,-949 ; S1.3@-1688,38 -1677,38 ; S1.3@-1688,38 -1677,49 ; -1677,38 -1677,49
  Bottom Layer w60: S1.3@-1751.94,41.94 -1718,8 -1677,-33 ; S1.3@-1745.06,41.94 S1.3@-1757.8,41.94 S1.2@-1757.8,-143.09 -1697.91,-143.09 -1611,-230 -1611,-758 -1365,-1004 -905,-1004 -360,-1004 -343,-987 ; S1.3@-1738.11,41.94 -1690.28,89.78 ; -1693.75,93.25 -1662,125 -1662,329 -1185.73,805.27 -1185.73,971.96 -1175.69,982 v1@-614,982
  other v1: -959,-1048 -848,-1048 -370,-1046 -283,-1046 -903.5,-1000 -326.5,-997.5 -959,-952 -848,-952 -370,-949 -283,-949 -1227,924 -1144,924 -664,938 -562,938 -1185.5,971.5 -613,981 -1144,1018 -1227,1019 -664,1024 -562,1024
pads on no net: S1.0 U1.2 U1.3 U1.5 U8.2 U8.3 U8.4 U8.5 U8.6 U8.7 U8.14 U8.15 U8.16 U8.17 U8.19 U8.21 U9.1 U9.2 U9.3 U9.5 U9.7 U9.8 U9.9 U9.33 U9.34 U9.35 U9.36 U9.38 U9.39 U9.40 U9.41 U9.42 U9.43 U9.47 U9.48 U9.49 U9.57 U9.58 U9.61 U9.65 U9.66 U9.71 U9.73 U9.77 U9.80 U9.81 U9.82 U9.83 U9.84 U9.85 U9.88 U9.89 U9.90 U9.91 U9.97 U9.98 U10.4 U11.2 U11.3 U11.4 U11.10 U11.11 U11.14 U11.15 U11.16 U11.17 U11.19 U11.21 U11.22 U11.29 U11.31 U11.38 U11.39 U11.40 U11.41 U11.43 U11.45 U11.46 U13.3 U13.4 U13.5 U13.6 U13.7 U13.8 U13.9 U13.10 U13.11 U13.14 U13.15 U13.16 U13.17 U13.18 U13.19 U13.20 U13.21 U13.22 U13.23 U13.25 U13.26 U13.27 U13.28 U13.29 U13.30 U13.31 U13.32 U13.33 U13.34 USB1.1 USB1.A5 USB1.A8 USB1.B5 USB1.B8

## Polygon pours and split planes (outlines as drawn)
GND on Top Layer "GND_L01_P006" (solid, remove dead copper, pour order 6): -2342.52,-1141.73 ccw(c-2224.41,-1141.73) -2224.41,-1259.84 1162.84,-1259.84 1163,-1260 ccw(c1166,-1211) 1215.05,-1213.02 1215,-1213.02 1361,-1213.02 1360.95,-1213.02 ccw(c1410,-1211) 1413,-1260 1498,-1260 ccw(c1501,-1211) 1550.05,-1213.02 1550,-1213.02 1696,-1213.02 1695.95,-1213.02 ccw(c1745,-1211) 1748,-1260 1833,-1260 ccw(c1836,-1211) 1885.05,-1213.02 1885,-1213.02 2031,-1213.02 2030.95,-1213.02 ccw(c2080,-1211) 2083,-1260 2224.41,-1260 2224.41,-1259.84 ccw(c2224.41,-1141.73) 2342.52,-1141.73 2342.52,1141.73 ccw(c2224.41,1141.73) 2224.41,1259.84 -2224.41,1259.84 ccw(c-2224.41,1141.73) -2342.52,1141.73 -2342.52,190 -2343,190 ccw(c-2155,199) -2136.23,11.72 -2136.16,11 -2136.16,-325 -2136.23,-325.72 ccw(c-2155,-513) -2343,-504 -2342.52,-498.48
GND on Top Layer "GND_L01_P008" (solid, pour order 8): -219,149 -219,-147 -141.59,-224.41 141.59,-224.41 225.48,-140.52 225.48,141.52 147,220 -148,220
GND on Bottom Layer "GND_L02_P010" (solid, pour order 10): -219,149 -219,-147 -141.59,-224.41 141.59,-224.41 225.48,-140.52 225.48,141.52 147,220 -148,220
GND on Bottom Layer "GND_L02_P007" (solid, pour order 7): -2357.81,-1145.79 ccw(c-2239.7,-1145.79) -2239.7,-1263.9 1147.55,-1263.9 1147.71,-1264.06 ccw(c1150.71,-1215.06) 1199.76,-1217.08 1199.71,-1217.08 1345.71,-1217.08 1345.66,-1217.08 ccw(c1394.71,-1215.06) 1397.71,-1264.06 1482.71,-1264.06 ccw(c1485.71,-1215.06) 1534.76,-1217.08 1534.71,-1217.08 1680.71,-1217.08 1680.66,-1217.08 ccw(c1729.71,-1215.06) 1732.71,-1264.06 1817.71,-1264.06 ccw(c1820.71,-1215.06) 1869.76,-1217.08 1869.71,-1217.08 2015.71,-1217.08 2015.66,-1217.08 ccw(c2064.71,-1215.06) 2067.71,-1264.06 2209.11,-1264.06 2209.11,-1263.9 ccw(c2209.11,-1145.79) 2327.23,-1145.79 2327.23,1137.67 ccw(c2209.12,1137.67) 2209.12,1255.78 -2239.7,1255.78 ccw(c-2239.7,1137.67) -2357.81,1137.67 -2357.81,185.94 -2358.29,185.94 ccw(c-2170.29,194.94) -2151.52,7.66 -2151.45,6.94 -2151.45,-329.06 -2151.52,-329.78 ccw(c-2170.29,-517.06) -2358.29,-508.06 -2357.81,-502.54

## Keep-outs
Keep-Out Layer:
  circle w10: c2224.41,-1141.73 r118.11
  circle w10: c2224.41,1141.73 r118.11
  circle w10: c-2224.41,1141.73 r118.11
  circle w10: c-2224.41,-1141.73 r118.11
  lines w10: -224.41,-152.56 cw(c-255.91,-152.56) -287.4,-152.56 -287.4,0 -287.4,152.56 cw(c-255.91,152.56) -224.41,152.56 ; -224.41,-151.57 -224.41,0 -224.41,151.57 ; -152.56,-224.41 ccw(c-152.56,-255.91) -152.56,-287.4 0,-287.4 152.56,-287.4 ccw(c152.56,-255.91) 152.56,-224.41 ; -152.56,224.41 cw(c-152.56,255.91) -152.56,287.4 0,287.4 152.56,287.4 cw(c152.56,255.91) 152.56,224.41 ; -151.57,-224.41 0,-224.41 151.57,-224.41 ; -151.57,224.41 0,224.41 151.57,224.41 ; 224.41,-152.56 ccw(c255.91,-152.56) 287.4,-152.56 287.4,0 287.4,152.56 ccw(c255.91,152.56) 224.41,152.56 ; 224.41,-151.57 224.41,0 224.41,151.57
  lines w25: -2343,-504 cw(c-2155,-513) -2136.23,-325.72 ; -2343,190 ccw(c-2155,199) -2136.23,11.72 ; -2342.52,-498.48 -2342.52,-1141.73 ccw(c-2224.41,-1141.73) -2224.41,-1259.84 1162.84,-1259.84 ; -2342.52,190 -2342.52,1141.73 cw(c-2224.41,1141.73) -2224.41,1259.84 2224.41,1259.84 cw(c2224.41,1141.73) 2342.52,1141.73 2342.52,-1141.73 cw(c2224.41,-1141.73) 2224.41,-1259.84 ; -2136.16,-325 -2136.16,11 ; 1163,-1260 ccw(c1166,-1211) 1215.05,-1213.02 ; 1215,-1213.02 1361,-1213.02 ; 1360.95,-1213.02 ccw(c1410,-1211) 1413,-1260 1498,-1260 ccw(c1501,-1211) 1550.05,-1213.02 ; 1550,-1213.02 1696,-1213.02 ; 1695.95,-1213.02 ccw(c1745,-1211) 1748,-1260 1833,-1260 ccw(c1836,-1211) 1885.05,-1213.02 ; 1885,-1213.02 2031,-1213.02 ; 2030.95,-1213.02 ccw(c2080,-1211) 2083,-1260 2224.41,-1260

## Other copper
Top Layer:
  rectangle net GND: -1519,-612 -1311,-472
  rectangle net GND: -1301,-788 -1185,-654
  region net GND: -786,794 -902,794 -902,660 -786,660
  region net GND: -213,794 -329,794 -329,660 -213,660
  rectangle net GND: -726,-789 -610,-655
  pour cut-out: 1162.84,1259.84 1162.84,1022 1925,1022 1925,1259.84
  pour cut-out: -225.48,-160.71
  region: -569.52,662.84
  region: -569.52,662.84
  region: -569.52,662.84
  region: -444.52,-1082.16
Bottom Layer:
  rectangle net GND: -1493,-102 -1408,-16
  rectangle net GND: -1521,-617 -1310,-461
  rectangle net GND: -901.98,660.78 -785.98,794.78
  rectangle net GND: -329.98,659.78 -213.98,793.78
  rectangle net GND: -1300.98,-788.22 -1184.98,-654.22
  rectangle net GND: -725.98,-789.22 -609.98,-655.22
  rectangle net VCC: -1001,-1077 -808,-918
  rectangle net VCC: -400,-1069 -255,-921
  rectangle net VCC: -690,914 -537,1048
  rectangle net VCC: -1253,894 -1119,1047
  rectangle net VCC: -1874,-209 -1632,155
  pour cut-out: 1162.92,1260 1162.92,1022.16 1925.08,1022.16 1925.08,1260
  region: 782.7,228.2
Multi-Layer:
  pour cut-out: -132,235 -182.5,285.5 -284.5,183.5 -234,133
  pour cut-out: 235,132 285.5,182.5 183.5,284.5 133,234
  pour cut-out: 132,-235 182.5,-285.5 284.5,-183.5 234,-133
  pour cut-out: -235,-132 -285.5,-182.5 -183.5,-284.5 -133,-234
  pour cut-out: 1975.52,-633.84 1779.16,-633.84 1759.52,-653.48 1759.52,-896.52 1780.84,-917.84 1974.16,-917.84 1996.52,-895.48 1996.52,-654.84
  pour cut-out: 1437,-11 1230,-11 1175.89,-65.11 1175.89,-230.89 1226,-281 1439,-281 1480.65,-239.35 1480.65,-54.65

## Silkscreen, mask and mechanical layers (free items; w line width, h text height)
Top Overlay:
  drawing of 39 lines, arcs and shapes, not listed
  text "Inspirer" at 1253.17,1062.97 h98.43
  text "+" at 440.76,1015.79 h60
  text "OFF" at -2277.98,313 h70 r270
  text "X" at 134,-28 h40
  text "Y" at 3,-166 h40
  text "Z" at 172,-171 h40
  text "ON" at -2277.98,-446 h70 r270
  text "+" at 2146.76,-604.21 h60
  text "Charge" at -1831,-893.98 h70
  text "Mode" at 1194,-1019 h60
  text "OK" at 1565,-1019 h60
  text "Reset" at 1847,-1019 h60
Bottom Overlay:
  drawing of 28 lines, arcs and shapes, not listed
  text "+" at 386,-624 h60
  text "Power" at -1981.98,-884.63 h70 r270
Top Solder:
  text "To Jia Liu" at -1942.13,-509.13 h45
  text "Balance car" at -1866.13,-591.13 h45
  text "By Jin Su" at -1766.13,-676.13 h45

## Text inside footprints (layer, text, board x,y; h text height)
B1: Top Overlay "+" at 705.11,652.43 h80 r135